# Altium PCB mada7.PcbDoc (part 2 of 3)
Units mil, origin at the board's own origin, x right, y up, seen from the top; angles counter-clockwise.
Board outline 3925 x 3925 mil, 2 copper layers (TopLayer, BottomLayer); 71 components, 72 nets, 888 pads, 9 vias.
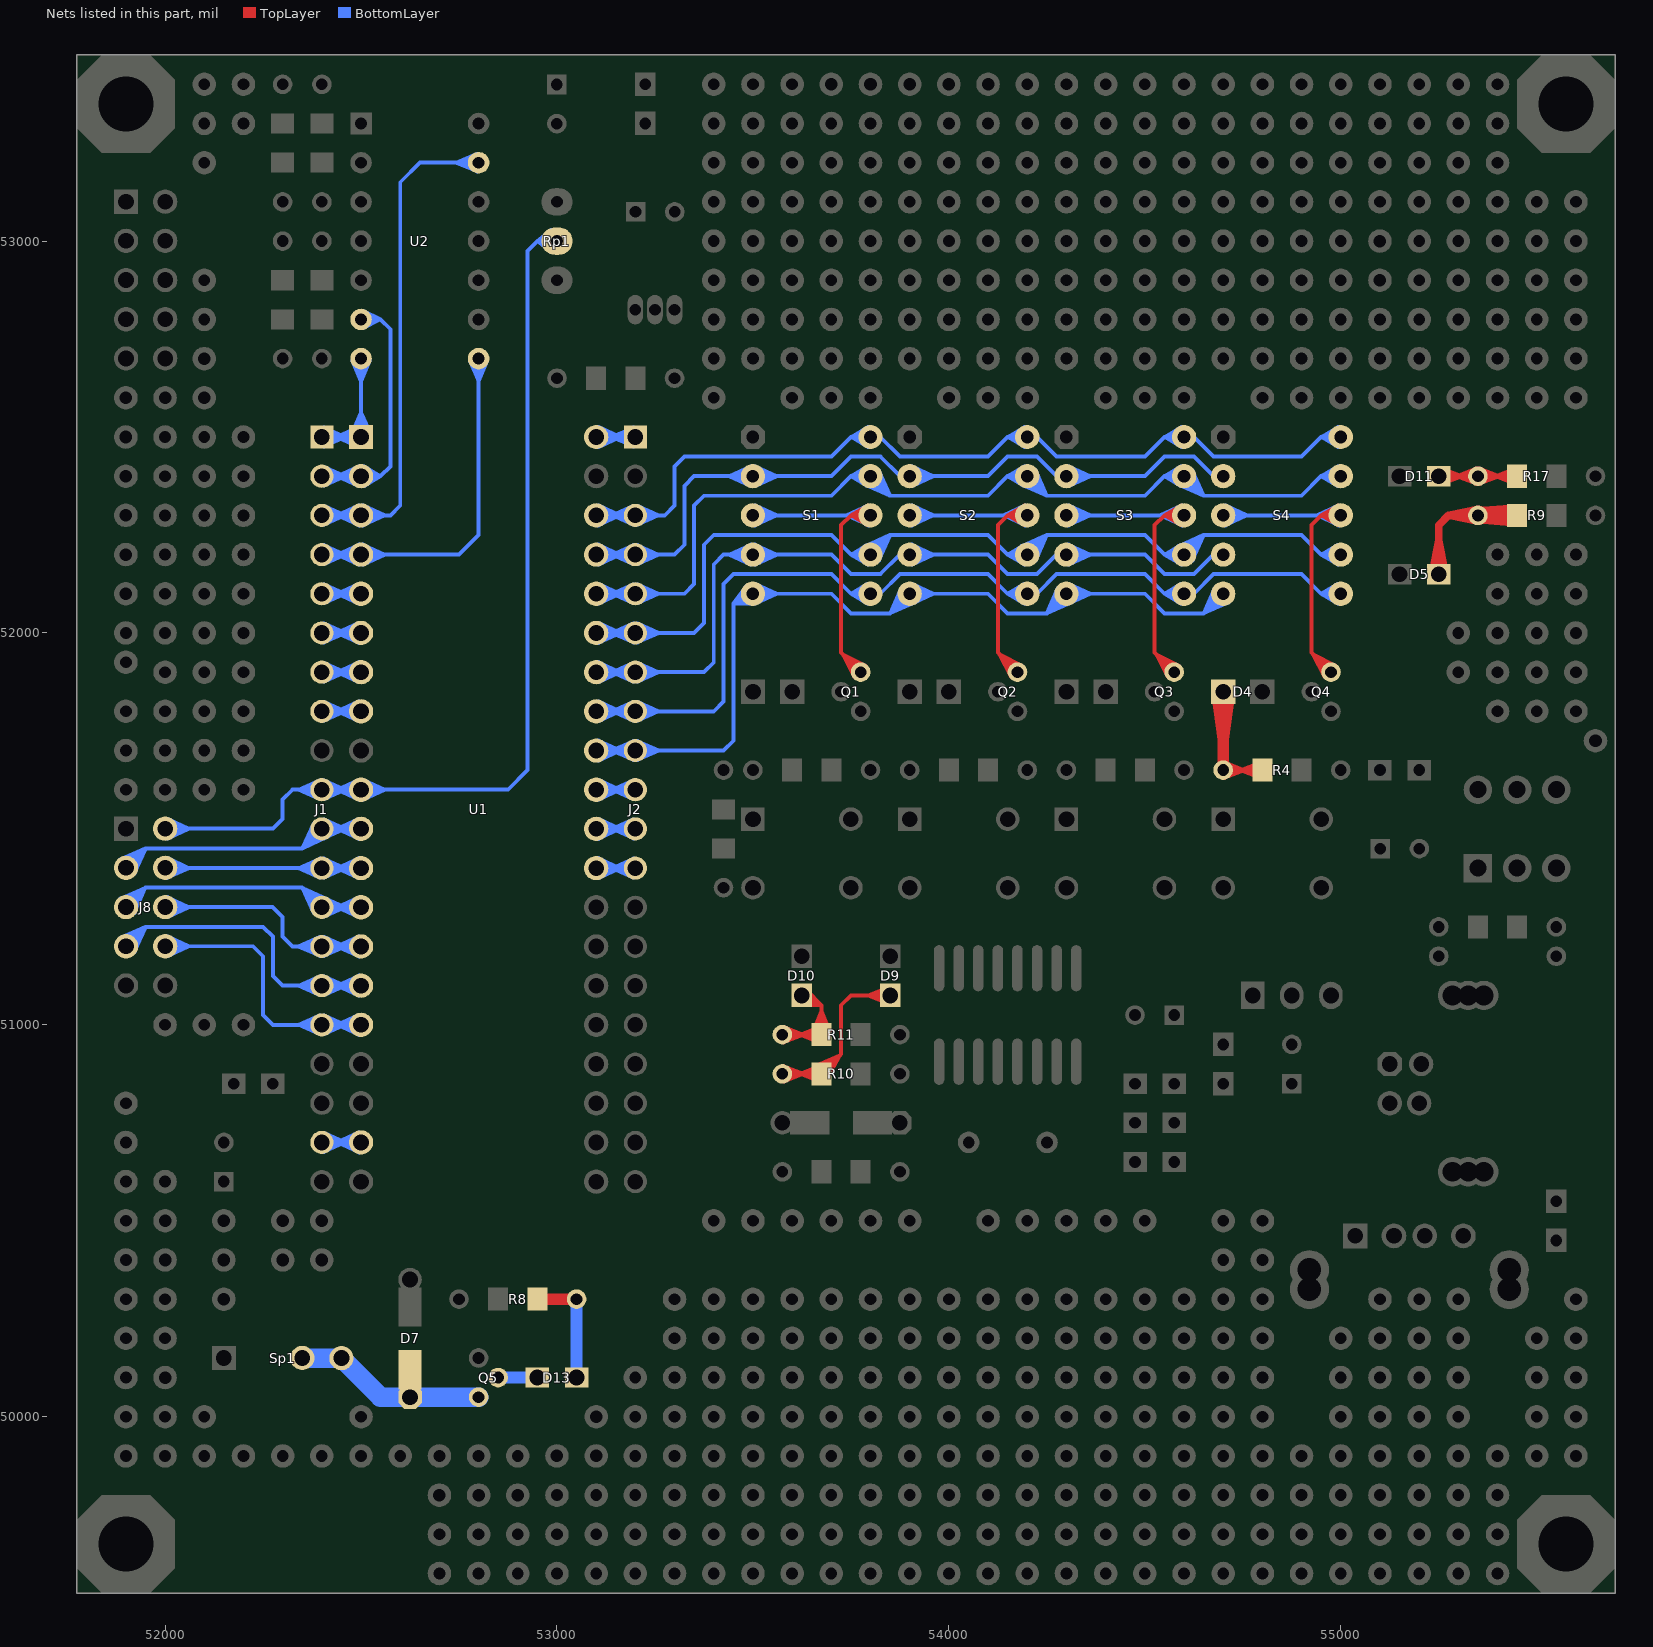
[diagram p2: the nets of this part, all layers, seen from the top]

## Via types
v1: diameter 30, hole 14, TopLayer to BottomLayer, 5 vias
v2: diameter 50, hole 28, TopLayer to BottomLayer, 4 vias

## Nets (pads, with @x,y where several pads share a name; then routed paths per layer and width w, separated by ;. In a path a pad name is that pad's centre, name@x,y a point inside that pad or via, vN(x,y) a via of type N, cw(c..) or ccw(c..) an arc to the next point about the centre after c; other vN are vias at no path point) (continued)
NetD4_2: D4.2 R4.2 R4.4 | length 984.4
  TopLayer w10: R4.2@54700,51650 R4.4@54800,51650 ; R4.2@54700.91,51640.04 54755,51650 ; R4.2@54700.91,51659.96 54755,51650 ; R4.2@54703.64,51630.33 54755,51650 ; R4.2@54703.64,51669.67 54755,51650 ; R4.4@54796.19,51629.77 54744.41,51650 ; R4.4@54796.19,51670.23 54744.41,51650 ; R4.4@54798.99,51639.46 54744.41,51650 ; R4.4@54798.99,51660.54 54744.41,51650
  TopLayer w30: D4.2@54684.04,51848.94 54700,51729 D4.2@54715.96,51848.94 ; R4.2@54700,51650 D4.2@54700,51850
NetD5_2: D5.2 R9.2 R9.4 | length 1512.1
  TopLayer w20: D5.2@55234.07,52151.49 55250,52236 D5.2@55265.93,52151.49 ; D5.2@55250,52150 55250,52275 55275,52300 ; R9.2@55348.5,52285.08 55275,52300 ; R9.2@55348.5,52314.92 55275,52300 ; R9.2@55351.32,52285.06 55435,52300 R9.2@55351.32,52314.94 ; R9.4@55447.03,52288.63 R9.2@55364.83,52312.53 ; R9.4@55447.03,52311.37 R9.2@55364.83,52287.47 ; R9.4@55448.58,52284.47 55364.41,52300 R9.4@55448.58,52315.53 ; R9.4@55450,52296.06 R9.2@55364.83,52287.47 ; R9.4@55450,52300 R9.2@55350,52300 55275,52300 ; R9.4@55450,52303.94 R9.2@55364.83,52312.53 ; R9.4@55450.15,52280.47 R9.2@55364.83,52287.47 ; R9.4@55450.15,52319.53 R9.2@55364.83,52312.53
NetD7_1: D7.1 D7.3 Q5.3 Sp1.2 Sp1.3 | length 866.6
  BottomLayer w10: Q5.3@52775,50050 Q5.3@52800,50050
  BottomLayer w50: Sp1.2@52350,50149.67 Sp1.3@52450.09,50149.67 ; Sp1.2@52350,50150 Sp1.3@52450.09,50149.67 ; Sp1.3@52450.09,50149.67 52549.76,50050 ; 52549.76,50050 D7.1@52625,50050 ; 52549.76,50050 D7.1@52625,50050 ; D7.1@52625,50050 Q5.3@52800,50050 D7.1@52625,50050
NetD9_2: D9.2 R10.2 R10.4 | length 1414.8
  TopLayer w10: R10.2@53575,50875 R10.4@53675,50875 53725,50925 53725,51050 53750,51075 D9.2@53850,51075 ; R10.2@53575.91,50865.04 53630,50875 ; R10.2@53575.91,50884.96 53630,50875 ; R10.2@53578.64,50855.33 53630,50875 ; R10.2@53578.64,50894.67 53630,50875 ; R10.4@53663.74,50896.18 53721.8,50921.8 ; R10.4@53668.52,50887.32 53721.8,50921.8 ; R10.4@53671.19,50854.77 53619.41,50875 ; R10.4@53671.19,50895.23 53619.41,50875 ; R10.4@53673.99,50864.46 53619.41,50875 ; R10.4@53673.99,50885.54 53619.41,50875 ; R10.4@53675,50878.94 53721.8,50921.8 ; R10.4@53682.78,50871.75 53721.8,50921.8 ; R10.4@53691.19,50866.21 53721.8,50921.8 ; D9.2@53846.06,51054.37 53794,51075 ; D9.2@53846.06,51095.63 53794,51075 ; D9.2@53848.92,51064.05 53794,51075 ; D9.2@53848.92,51085.95 53794,51075
NetD10_2: D10.2 R11.2 R11.4 | length 1201.8
  TopLayer w10: R11.2@53575,50975 R11.4@53675,50975 53675,51050 ; R11.2@53575.91,50965.04 53630,50975 ; R11.2@53575.91,50984.96 53630,50975 ; R11.2@53578.64,50955.33 53630,50975 ; R11.2@53578.64,50994.67 53630,50975 ; D10.2@53620.77,51050.43 53675,51050 ; D10.2@53621.79,51060.48 53675,51050 ; D10.2@53625,51071 53675,51050 ; D10.2@53630.27,51080.66 53675,51050 ; D10.2@53636.73,51088.42 53675,51050 ; D10.2@53650,51075 53675,51050 ; R11.4@53654.77,50982.75 53675,51034.53 ; R11.4@53664.46,50979.95 53675,51034.53 ; R11.4@53671.19,50954.77 53619.41,50975 ; R11.4@53671.19,50995.23 53619.41,50975 ; R11.4@53673.99,50964.46 53619.41,50975 ; R11.4@53673.99,50985.54 53619.41,50975 ; R11.4@53675,50978.94 53675,51034.53 ; R11.4@53685.54,50979.95 53675,51034.53 ; R11.4@53695.23,50982.75 53675,51034.53
NetD11_2: D11.2 R17.2 R17.4 | length 1142.4
  TopLayer w10: D11.2@55250,52400 R17.2@55350,52400 R17.4@55450,52400 ; D11.2@55254,52400 55310,52400 ; D11.2@55255.08,52389.05 55310,52400 ; D11.2@55255.08,52410.95 55310,52400 ; D11.2@55257.94,52379.37 55310,52400 ; D11.2@55257.94,52420.63 55310,52400 ; R17.2@55346.36,52380.33 55295,52400 ; R17.2@55346.36,52419.67 55295,52400 ; R17.2@55349.09,52390.04 55295,52400 ; R17.2@55349.09,52409.96 55295,52400 ; R17.2@55350.91,52390.04 55405,52400 ; R17.2@55350.91,52409.96 55405,52400 ; R17.2@55353.64,52380.33 55405,52400 ; R17.2@55353.64,52419.67 55405,52400 ; R17.4@55446.19,52379.77 55394.41,52400 ; R17.4@55446.19,52420.23 55394.41,52400 ; R17.4@55448.99,52389.46 55394.41,52400 ; R17.4@55448.99,52410.54 55394.41,52400
NetD13_1: D13.1 Q5.2 | length 196
  BottomLayer w30: D13.1@52946,50100 Q5.2@52850,50100 D13.1@52950,50100
NetD13_2: D13.2 R8.1 R8.3 | length 400
  TopLayer w30: R8.3@52950,50300 R8.1@53050,50300 R8.3@52950,50300
  BottomLayer w30: D13.2@53050,50100 R8.1@53050,50300
NetJ1_5: J1.5 U1.5 | length 704.1
  BottomLayer w10: J1.5@52400,52100 U1.5@52500,52100 ; J1.5@52401.77,52085.58 52459.53,52100 ; J1.5@52401.77,52114.42 52459.53,52100 ; J1.5@52405.05,52076 52459.53,52100 ; J1.5@52405.05,52124 52459.53,52100 ; U1.5@52494.46,52074.6 52439,52100 ; U1.5@52494.46,52125.4 52439,52100 ; U1.5@52497.9,52084.14 52439,52100 ; U1.5@52497.9,52115.86 52439,52100 ; U1.5@52499.7,52094.01 52439,52100 ; U1.5@52499.7,52105.99 52439,52100
NetJ1_6: J1.6 U1.6 | length 704.1
  BottomLayer w10: J1.6@52400,52000 U1.6@52500,52000 ; J1.6@52401.77,51985.58 52459.53,52000 ; J1.6@52401.77,52014.42 52459.53,52000 ; J1.6@52405.05,51976 52459.53,52000 ; J1.6@52405.05,52024 52459.53,52000 ; U1.6@52494.46,51974.6 52439,52000 ; U1.6@52494.46,52025.4 52439,52000 ; U1.6@52497.9,51984.14 52439,52000 ; U1.6@52497.9,52015.86 52439,52000 ; U1.6@52499.7,51994.01 52439,52000 ; U1.6@52499.7,52005.99 52439,52000
NetJ1_7: J1.7 U1.7 | length 704.1
  BottomLayer w10: J1.7@52400,51900 U1.7@52500,51900 ; J1.7@52401.77,51885.58 52459.53,51900 ; J1.7@52401.77,51914.42 52459.53,51900 ; J1.7@52405.05,51876 52459.53,51900 ; J1.7@52405.05,51924 52459.53,51900 ; U1.7@52494.46,51874.6 52439,51900 ; U1.7@52494.46,51925.4 52439,51900 ; U1.7@52497.9,51884.14 52439,51900 ; U1.7@52497.9,51915.86 52439,51900 ; U1.7@52499.7,51894.01 52439,51900 ; U1.7@52499.7,51905.99 52439,51900
NetJ1_8: J1.8 U1.8 | length 704.1
  BottomLayer w10: J1.8@52400,51800 U1.8@52500,51800 ; J1.8@52401.77,51785.58 52459.53,51800 ; J1.8@52401.77,51814.42 52459.53,51800 ; J1.8@52405.05,51776 52459.53,51800 ; J1.8@52405.05,51824 52459.53,51800 ; U1.8@52494.46,51774.6 52439,51800 ; U1.8@52494.46,51825.4 52439,51800 ; U1.8@52497.9,51784.14 52439,51800 ; U1.8@52497.9,51815.86 52439,51800 ; U1.8@52499.7,51794.01 52439,51800 ; U1.8@52499.7,51805.99 52439,51800
NetJ1_19: J1.19 U1.19 | length 704.1
  BottomLayer w10: J1.19@52400,50700 U1.19@52500,50700 ; J1.19@52401.77,50685.58 52459.53,50700 ; J1.19@52401.77,50714.42 52459.53,50700 ; J1.19@52405.05,50676 52459.53,50700 ; J1.19@52405.05,50724 52459.53,50700 ; U1.19@52494.46,50674.6 52439,50700 ; U1.19@52494.46,50725.4 52439,50700 ; U1.19@52497.9,50684.14 52439,50700 ; U1.19@52497.9,50715.86 52439,50700 ; U1.19@52499.7,50694.01 52439,50700 ; U1.19@52499.7,50705.99 52439,50700
NetJ2_1: J2.1 U1.40 | length 704.1
  BottomLayer w10: U1.40@53100,52500 J2.1@53200,52500 ; U1.40@53100.3,52494.01 53161,52500 ; U1.40@53100.3,52505.99 53161,52500 ; U1.40@53102.1,52484.14 53161,52500 ; U1.40@53102.1,52515.86 53161,52500 ; U1.40@53105.54,52474.6 53161,52500 ; U1.40@53105.54,52525.4 53161,52500 ; J2.1@53194.95,52476 53140.47,52500 ; J2.1@53194.95,52524 53140.47,52500 ; J2.1@53198.23,52485.58 53140.47,52500 ; J2.1@53198.23,52514.42 53140.47,52500
NetJ2_10: J2.10 U1.31 | length 704.1
  BottomLayer w10: U1.31@53100,51600 J2.10@53200,51600 ; U1.31@53100.3,51594.01 53161,51600 ; U1.31@53100.3,51605.99 53161,51600 ; U1.31@53102.1,51584.14 53161,51600 ; U1.31@53102.1,51615.86 53161,51600 ; U1.31@53105.54,51574.6 53161,51600 ; U1.31@53105.54,51625.4 53161,51600 ; J2.10@53194.95,51576 53140.47,51600 ; J2.10@53194.95,51624 53140.47,51600 ; J2.10@53198.23,51585.58 53140.47,51600 ; J2.10@53198.23,51614.42 53140.47,51600
NetJ2_11: J2.11 U1.30 | length 704.1
  BottomLayer w10: U1.30@53100,51500 J2.11@53200,51500 ; U1.30@53100.3,51494.01 53161,51500 ; U1.30@53100.3,51505.99 53161,51500 ; U1.30@53102.1,51484.14 53161,51500 ; U1.30@53102.1,51515.86 53161,51500 ; U1.30@53105.54,51474.6 53161,51500 ; U1.30@53105.54,51525.4 53161,51500 ; J2.11@53194.95,51476 53140.47,51500 ; J2.11@53194.95,51524 53140.47,51500 ; J2.11@53198.23,51485.58 53140.47,51500 ; J2.11@53198.23,51514.42 53140.47,51500
NetJ2_12: J2.12 U1.29 | length 704.1
  BottomLayer w10: U1.29@53100,51400 J2.12@53200,51400 ; U1.29@53100.3,51394.01 53161,51400 ; U1.29@53100.3,51405.99 53161,51400 ; U1.29@53102.1,51384.14 53161,51400 ; U1.29@53102.1,51415.86 53161,51400 ; U1.29@53105.54,51374.6 53161,51400 ; U1.29@53105.54,51425.4 53161,51400 ; J2.12@53194.95,51376 53140.47,51400 ; J2.12@53194.95,51424 53140.47,51400 ; J2.12@53198.23,51385.58 53140.47,51400 ; J2.12@53198.23,51414.42 53140.47,51400
NetQ1_3: Q1.3 S1.3 S1.8 | length 2074.5
  TopLayer w10: Q1.3@53758.86,51888.19 53728.79,51946.21 ; Q1.3@53767.41,51893.49 53728.79,51946.21 ; Q1.3@53775,51900 53725,51950 53725,52275 53750,52300 ; Q1.3@53781.51,51907.59 53728.79,51946.21 ; Q1.3@53786.81,51916.14 53728.79,51946.21 ; S1.8@53793.24,52274.89 53750,52300 ; S1.8@53793.24,52325.11 53750,52300 ; S1.8@53797.44,52284.21 53750,52300 ; S1.8@53797.44,52315.79 53750,52300 ; S1.8@53799.64,52294.01 53750,52300 ; S1.8@53799.64,52305.99 53750,52300 ; S1.8@53800,52300 53750,52300
  BottomLayer w10: S1.3@53500,52300 S1.8@53800,52300 ; S1.3@53500.3,52294.01 53561,52300 ; S1.3@53500.3,52305.99 53561,52300 ; S1.3@53502.1,52284.14 53561,52300 ; S1.3@53502.1,52315.86 53561,52300 ; S1.3@53505.54,52274.6 53561,52300 ; S1.3@53505.54,52325.4 53561,52300 ; S1.8@53794.46,52274.6 53739,52300 ; S1.8@53794.46,52325.4 53739,52300 ; S1.8@53797.9,52284.14 53739,52300 ; S1.8@53797.9,52315.86 53739,52300 ; S1.8@53799.7,52294.01 53739,52300 ; S1.8@53799.7,52305.99 53739,52300
NetQ2_3: Q2.3 S2.3 S2.8 | length 2074.5
  TopLayer w10: Q2.3@54158.86,51888.19 54128.79,51946.21 ; Q2.3@54167.41,51893.49 54128.79,51946.21 ; Q2.3@54175,51900 54125,51950 54125,52275 54150,52300 ; Q2.3@54181.51,51907.59 54128.79,51946.21 ; Q2.3@54186.81,51916.14 54128.79,51946.21 ; S2.8@54193.24,52274.89 54150,52300 ; S2.8@54193.24,52325.11 54150,52300 ; S2.8@54197.44,52284.21 54150,52300 ; S2.8@54197.44,52315.79 54150,52300 ; S2.8@54199.64,52294.01 54150,52300 ; S2.8@54199.64,52305.99 54150,52300 ; S2.8@54200,52300 54150,52300
  BottomLayer w10: S2.3@53900,52300 S2.8@54200,52300 ; S2.3@53900.3,52294.01 53961,52300 ; S2.3@53900.3,52305.99 53961,52300 ; S2.3@53902.1,52284.14 53961,52300 ; S2.3@53902.1,52315.86 53961,52300 ; S2.3@53905.54,52274.6 53961,52300 ; S2.3@53905.54,52325.4 53961,52300 ; S2.8@54194.46,52274.6 54139,52300 ; S2.8@54194.46,52325.4 54139,52300 ; S2.8@54197.9,52284.14 54139,52300 ; S2.8@54197.9,52315.86 54139,52300 ; S2.8@54199.7,52294.01 54139,52300 ; S2.8@54199.7,52305.99 54139,52300
NetQ3_3: Q3.3 S3.3 S3.8 | length 2074.5
  TopLayer w10: Q3.3@54558.86,51888.19 54528.79,51946.21 ; Q3.3@54567.41,51893.49 54528.79,51946.21 ; Q3.3@54575,51900 54525,51950 54525,52275 54550,52300 ; Q3.3@54581.51,51907.59 54528.79,51946.21 ; Q3.3@54586.81,51916.14 54528.79,51946.21 ; S3.8@54593.24,52274.89 54550,52300 ; S3.8@54593.24,52325.11 54550,52300 ; S3.8@54597.44,52284.21 54550,52300 ; S3.8@54597.44,52315.79 54550,52300 ; S3.8@54599.64,52294.01 54550,52300 ; S3.8@54599.64,52305.99 54550,52300 ; S3.8@54600,52300 54550,52300
  BottomLayer w10: S3.3@54300,52300 S3.8@54600,52300 ; S3.3@54300.3,52294.01 54361,52300 ; S3.3@54300.3,52305.99 54361,52300 ; S3.3@54302.1,52284.14 54361,52300 ; S3.3@54302.1,52315.86 54361,52300 ; S3.3@54305.54,52274.6 54361,52300 ; S3.3@54305.54,52325.4 54361,52300 ; S3.8@54594.46,52274.6 54539,52300 ; S3.8@54594.46,52325.4 54539,52300 ; S3.8@54597.9,52284.14 54539,52300 ; S3.8@54597.9,52315.86 54539,52300 ; S3.8@54599.7,52294.01 54539,52300 ; S3.8@54599.7,52305.99 54539,52300
NetQ4_3: Q4.3 S4.3 S4.8 | length 2074.5
  TopLayer w10: Q4.3@54958.86,51888.19 54928.79,51946.21 ; Q4.3@54967.41,51893.49 54928.79,51946.21 ; Q4.3@54975,51900 54925,51950 54925,52275 54950,52300 ; Q4.3@54981.51,51907.59 54928.79,51946.21 ; Q4.3@54986.81,51916.14 54928.79,51946.21 ; S4.8@54993.24,52274.89 54950,52300 ; S4.8@54993.24,52325.11 54950,52300 ; S4.8@54997.44,52284.21 54950,52300 ; S4.8@54997.44,52315.79 54950,52300 ; S4.8@54999.64,52294.01 54950,52300 ; S4.8@54999.64,52305.99 54950,52300 ; S4.8@55000,52300 54950,52300
  BottomLayer w10: S4.3@54700,52300 S4.8@55000,52300 ; S4.3@54700.3,52294.01 54761,52300 ; S4.3@54700.3,52305.99 54761,52300 ; S4.3@54702.1,52284.14 54761,52300 ; S4.3@54702.1,52315.86 54761,52300 ; S4.3@54705.54,52274.6 54761,52300 ; S4.3@54705.54,52325.4 54761,52300 ; S4.8@54994.46,52274.6 54939,52300 ; S4.8@54994.46,52325.4 54939,52300 ; S4.8@54997.9,52284.14 54939,52300 ; S4.8@54997.9,52315.86 54939,52300 ; S4.8@54999.7,52294.01 54939,52300 ; S4.8@54999.7,52305.99 54939,52300
P00: J1.1 U1.1 U2.7 | length 1500.1
  BottomLayer w10: J1.1@52400,52500 U1.1@52500,52500 U2.7@52500,52700 ; J1.1@52401.77,52485.58 52459.53,52500 ; J1.1@52401.77,52514.42 52459.53,52500 ; J1.1@52405.05,52476 52459.53,52500 ; J1.1@52405.05,52524 52459.53,52500 ; U1.1@52474.6,52505.54 52500,52561 ; U2.7@52477.93,52695.6 52500,52642.5 ; U1.1@52484.14,52502.1 52500,52561 ; U2.7@52487.57,52698.64 52500,52642.5 ; U1.1@52494.01,52500.3 52500,52561 ; U1.1@52494.46,52474.6 52439,52500 ; U1.1@52494.46,52525.4 52439,52500 ; U1.1@52497.9,52484.14 52439,52500 ; U1.1@52497.9,52515.86 52439,52500 ; U1.1@52499.7,52494.01 52439,52500 ; U1.1@52499.7,52505.99 52439,52500 ; U1.1@52505.99,52500.3 52500,52561 ; U2.7@52512.43,52698.64 52500,52642.5 ; U1.1@52515.86,52502.1 52500,52561 ; U2.7@52522.07,52695.6 52500,52642.5 ; U1.1@52525.4,52505.54 52500,52561
P01: J1.2 U1.2 U2.6 | length 1724.8
  BottomLayer w10: J1.2@52400,52400 U1.2@52500,52400 52550,52400 ; J1.2@52401.77,52385.58 52459.53,52400 ; J1.2@52401.77,52414.42 52459.53,52400 ; J1.2@52405.05,52376 52459.53,52400 ; J1.2@52405.05,52424 52459.53,52400 ; U1.2@52494.46,52374.6 52439,52400 ; U1.2@52494.46,52425.4 52439,52400 ; U1.2@52497.9,52384.14 52439,52400 ; U1.2@52497.9,52415.86 52439,52400 ; U1.2@52499.7,52394.01 52439,52400 ; U1.2@52499.7,52405.99 52439,52400 ; U2.6@52500,52800 52550,52800 ; U1.2@52500.36,52394.01 52550,52400 ; U1.2@52500.36,52405.99 52550,52400 ; U2.6@52501.56,52787.6 52550,52800 ; U2.6@52501.56,52812.4 52550,52800 ; U1.2@52502.56,52384.21 52550,52400 ; U1.2@52502.56,52415.79 52550,52400 ; U2.6@52505.06,52778.08 52550,52800 ; U2.6@52505.06,52821.92 52550,52800 ; U1.2@52506.76,52374.89 52550,52400 ; U1.2@52506.76,52425.11 52550,52400 ; 52550,52400 52575,52425 52575,52775 52550,52800
P02: J1.3 U1.3 U2.13 | length 2456.2
  BottomLayer w10: J1.3@52400,52300 U1.3@52500,52300 52575,52300 52600,52325 52600,53150 52650,53200 U2.13@52800,53200 ; J1.3@52401.77,52285.58 52459.53,52300 ; J1.3@52401.77,52314.42 52459.53,52300 ; J1.3@52405.05,52276 52459.53,52300 ; J1.3@52405.05,52324 52459.53,52300 ; U1.3@52494.46,52274.6 52439,52300 ; U1.3@52494.46,52325.4 52439,52300 ; U1.3@52497.9,52284.14 52439,52300 ; U1.3@52497.9,52315.86 52439,52300 ; U1.3@52499.7,52294.01 52439,52300 ; U1.3@52499.7,52305.99 52439,52300 ; U1.3@52500.3,52294.01 52561,52300 ; U1.3@52500.3,52305.99 52561,52300 ; U1.3@52502.1,52284.14 52561,52300 ; U1.3@52502.1,52315.86 52561,52300 ; U1.3@52505.54,52274.6 52561,52300 ; U1.3@52505.54,52325.4 52561,52300 ; U2.13@52795.6,53177.93 52742.5,53200 ; U2.13@52795.6,53222.07 52742.5,53200 ; U2.13@52798.64,53187.57 52742.5,53200 ; U2.13@52798.64,53212.43 52742.5,53200
P03: J1.4 U1.4 U2.8 | length 2070.8
  BottomLayer w10: J1.4@52400,52200 U1.4@52500,52200 52750,52200 52800,52250 U2.8@52800,52700 ; J1.4@52401.77,52185.58 52459.53,52200 ; J1.4@52401.77,52214.42 52459.53,52200 ; J1.4@52405.05,52176 52459.53,52200 ; J1.4@52405.05,52224 52459.53,52200 ; U1.4@52494.46,52174.6 52439,52200 ; U1.4@52494.46,52225.4 52439,52200 ; U1.4@52497.9,52184.14 52439,52200 ; U1.4@52497.9,52215.86 52439,52200 ; U1.4@52499.7,52194.01 52439,52200 ; U1.4@52499.7,52205.99 52439,52200 ; U1.4@52500.3,52194.01 52561,52200 ; U1.4@52500.3,52205.99 52561,52200 ; U1.4@52502.1,52184.14 52561,52200 ; U1.4@52502.1,52215.86 52561,52200 ; U1.4@52505.54,52174.6 52561,52200 ; U1.4@52505.54,52225.4 52561,52200 ; U2.8@52777.93,52695.6 52800,52642.5 ; U2.8@52787.57,52698.64 52800,52642.5 ; U2.8@52812.43,52698.64 52800,52642.5 ; U2.8@52822.07,52695.6 52800,52642.5
P11: J1.10 J8.2 Rp1.2 U1.10 | length 4315.5
  BottomLayer w10: J8.2@52000.29,51500.5 52275.5,51500.5 52300,51525 52300,51575 52325,51600 J1.10@52400,51600 U1.10@52500,51600 52875,51600 52925,51650 52925,52550 52925,52975 52950,53000 ; J8.2@52000.58,51494.51 52061.29,51500.5 ; J8.2@52000.58,51506.49 52061.29,51500.5 ; J8.2@52002.39,51484.64 52061.29,51500.5 ; J8.2@52002.39,51516.36 52061.29,51500.5 ; J8.2@52005.83,51475.1 52061.29,51500.5 ; J8.2@52005.83,51525.9 52061.29,51500.5 ; J1.10@52394.95,51576 52340.47,51600 ; J1.10@52394.95,51624 52340.47,51600 ; J1.10@52398.23,51585.58 52340.47,51600 ; J1.10@52398.23,51614.42 52340.47,51600 ; J1.10@52401.77,51585.58 52459.53,51600 ; J1.10@52401.77,51614.42 52459.53,51600 ; J1.10@52405.05,51576 52459.53,51600 ; J1.10@52405.05,51624 52459.53,51600 ; U1.10@52494.46,51574.6 52439,51600 ; U1.10@52494.46,51625.4 52439,51600 ; U1.10@52497.9,51584.14 52439,51600 ; U1.10@52497.9,51615.86 52439,51600 ; U1.10@52499.7,51594.01 52439,51600 ; U1.10@52499.7,51605.99 52439,51600 ; U1.10@52500.3,51594.01 52561,51600 ; U1.10@52500.3,51605.99 52561,51600 ; U1.10@52502.1,51584.14 52561,51600 ; U1.10@52502.1,51615.86 52561,51600 ; U1.10@52505.54,51574.6 52561,51600 ; U1.10@52505.54,51625.4 52561,51600 ; Rp1.2@52985,52971.72 52950,53000 ; Rp1.2@52985,53028.28 52950,53000 ; Rp1.2@52990.56,52980.5 52950,53000 ; Rp1.2@52990.56,53019.5 52950,53000 ; Rp1.2@52993.89,52990.06 52950,53000 ; Rp1.2@52993.89,53009.94 52950,53000 ; Rp1.2@52995,53000 52950,53000 ; Rp1.2@53000,53000 52950,53000
P12: J1.11 J8.3 U1.11 | length 2019
  BottomLayer w10: J8.3@51885.67,51422 51950,51450 ; J8.3@51890.36,51413.05 51950,51450 ; J8.3@51896.24,51404.93 51950,51450 ; J8.3@51904.7,51396.43 51950,51450 ; J8.3@51912.8,51390.52 51950,51450 ; J8.3@51921.73,51385.79 51950,51450 ; J1.11@52379.91,51514.07 52350,51450 ; J1.11@52388.73,51509.16 52350,51450 ; J1.11@52401.77,51485.58 52459.53,51500 ; J1.11@52401.77,51514.42 52459.53,51500 ; J1.11@52405.05,51476 52459.53,51500 ; J1.11@52405.05,51524 52459.53,51500 ; J1.11@52409.16,51488.73 52350,51450 ; J1.11@52414.07,51479.91 52350,51450 ; U1.11@52494.46,51474.6 52439,51500 ; U1.11@52494.46,51525.4 52439,51500 ; U1.11@52497.9,51484.14 52439,51500 ; U1.11@52497.9,51515.86 52439,51500 ; U1.11@52499.7,51494.01 52439,51500 ; U1.11@52499.7,51505.99 52439,51500 ; U1.11@52500,51500 J1.11@52400,51500 52350,51450 ; 51950,51450 J8.3@51900.29,51400.5 51900.5,51400.5 51950,51450 ; 51950,51450 52350,51450
P13: J1.12 J8.4 U1.12 | length 1769.3
  BottomLayer w10: J8.4@52000,51400 J1.12@52400,51400 U1.12@52500,51400 ; J8.4@52000.29,51400.5 52061.29,51400 ; J8.4@52000.53,51394.5 52061.29,51400 ; J8.4@52000.63,51406.49 52061.29,51400 ; J8.4@52002.26,51384.62 52061.29,51400 ; J8.4@52002.52,51416.34 52061.29,51400 ; J8.4@52005.62,51375.05 52061.29,51400 ; J8.4@52006.04,51425.86 52061.29,51400 ; J1.12@52394.95,51376 52340.47,51400 ; J1.12@52394.95,51424 52340.47,51400 ; J1.12@52398.23,51385.58 52340.47,51400 ; J1.12@52398.23,51414.42 52340.47,51400 ; J1.12@52401.77,51385.58 52459.53,51400 ; J1.12@52401.77,51414.42 52459.53,51400 ; J1.12@52405.05,51376 52459.53,51400 ; J1.12@52405.05,51424 52459.53,51400 ; U1.12@52494.46,51374.6 52439,51400 ; U1.12@52494.46,51425.4 52439,51400 ; U1.12@52497.9,51384.14 52439,51400 ; U1.12@52497.9,51415.86 52439,51400 ; U1.12@52499.7,51394.01 52439,51400 ; U1.12@52499.7,51405.99 52439,51400
P14: J1.13 J8.5 U1.13 | length 1947.9
  BottomLayer w10: J8.5@51885.64,51321.98 51949.79,51350 ; J8.5@51890.34,51313.03 51949.79,51350 ; J8.5@51896.23,51304.92 51949.79,51350 ; J8.5@51900.29,51300.5 51949.79,51350 ; J8.5@51904.71,51296.44 51949.79,51350 ; J8.5@51912.82,51290.55 51949.79,51350 ; J8.5@51921.77,51285.85 51949.79,51350 ; J1.13@52379.91,51285.93 52350,51350 ; J1.13@52388.73,51290.84 52350,51350 ; J1.13@52401.77,51285.58 52459.53,51300 ; J1.13@52401.77,51314.42 52459.53,51300 ; J1.13@52405.05,51276 52459.53,51300 ; J1.13@52405.05,51324 52459.53,51300 ; J1.13@52409.16,51311.27 52350,51350 ; J1.13@52414.07,51320.09 52350,51350 ; U1.13@52494.46,51274.6 52439,51300 ; U1.13@52494.46,51325.4 52439,51300 ; U1.13@52497.9,51284.14 52439,51300 ; U1.13@52497.9,51315.86 52439,51300 ; U1.13@52499.7,51294.01 52439,51300 ; U1.13@52499.7,51305.99 52439,51300 ; U1.13@52500,51300 J1.13@52400,51300 52350,51350 ; 51949.79,51350 52350,51350
P15: J1.14 J8.6 U1.14 | length 1778.9
  BottomLayer w10: J8.6@52000.29,51300.5 52274.5,51300.5 52300,51275 52300,51225 52325,51200 J1.14@52400,51200 U1.14@52500,51200 ; J8.6@52000.58,51294.51 52061.29,51300.5 ; J8.6@52000.58,51306.49 52061.29,51300.5 ; J8.6@52002.39,51284.64 52061.29,51300.5 ; J8.6@52002.39,51316.36 52061.29,51300.5 ; J8.6@52005.83,51275.1 52061.29,51300.5 ; J8.6@52005.83,51325.9 52061.29,51300.5 ; J1.14@52394.95,51176 52340.47,51200 ; J1.14@52394.95,51224 52340.47,51200 ; J1.14@52398.23,51185.58 52340.47,51200 ; J1.14@52398.23,51214.42 52340.47,51200 ; J1.14@52401.77,51185.58 52459.53,51200 ; J1.14@52401.77,51214.42 52459.53,51200 ; J1.14@52405.05,51176 52459.53,51200 ; J1.14@52405.05,51224 52459.53,51200 ; U1.14@52494.46,51174.6 52439,51200 ; U1.14@52494.46,51225.4 52439,51200 ; U1.14@52497.9,51184.14 52439,51200 ; U1.14@52497.9,51215.86 52439,51200 ; U1.14@52499.7,51194.01 52439,51200 ; U1.14@52499.7,51205.99 52439,51200
P16: J1.15 J8.7 U1.15 | length 2074.2
  BottomLayer w10: J8.7@51885.67,51222 51950,51250 ; J8.7@51890.36,51213.05 51950,51250 ; J8.7@51896.24,51204.93 51950,51250 ; J8.7@51904.7,51196.43 51950,51250 ; J8.7@51912.8,51190.52 51950,51250 ; J8.7@51921.73,51185.79 51950,51250 ; J1.15@52394.95,51076 52340.47,51100 ; J1.15@52394.95,51124 52340.47,51100 ; J1.15@52398.23,51085.58 52340.47,51100 ; J1.15@52398.23,51114.42 52340.47,51100 ; J1.15@52401.77,51085.58 52459.53,51100 ; J1.15@52401.77,51114.42 52459.53,51100 ; J1.15@52405.05,51076 52459.53,51100 ; J1.15@52405.05,51124 52459.53,51100 ; U1.15@52494.46,51074.6 52439,51100 ; U1.15@52494.46,51125.4 52439,51100 ; U1.15@52497.9,51084.14 52439,51100 ; U1.15@52497.9,51115.86 52439,51100 ; U1.15@52499.7,51094.01 52439,51100 ; U1.15@52499.7,51105.99 52439,51100 ; U1.15@52500,51100 J1.15@52400,51100 52300,51100 52275,51125 52275,51225 52250,51250 51950,51250 ; 51950,51250 J8.7@51900.29,51200.5 51900.5,51200.5 51950,51250
P17: J1.16 J8.8 U1.16 | length 1878.9
  BottomLayer w10: J8.8@52000.29,51200.5 52224.5,51200.5 52250,51175 52250,51025 52275,51000 J1.16@52400,51000 U1.16@52500,51000 ; J8.8@52000.58,51194.51 52061.29,51200.5 ; J8.8@52000.58,51206.49 52061.29,51200.5 ; J8.8@52002.39,51184.64 52061.29,51200.5 ; J8.8@52002.39,51216.36 52061.29,51200.5 ; J8.8@52005.83,51175.1 52061.29,51200.5 ; J8.8@52005.83,51225.9 52061.29,51200.5 ; J1.16@52394.95,50976 52340.47,51000 ; J1.16@52394.95,51024 52340.47,51000 ; J1.16@52398.23,50985.58 52340.47,51000 ; J1.16@52398.23,51014.42 52340.47,51000 ; J1.16@52401.77,50985.58 52459.53,51000 ; J1.16@52401.77,51014.42 52459.53,51000 ; J1.16@52405.05,50976 52459.53,51000 ; J1.16@52405.05,51024 52459.53,51000 ; U1.16@52494.46,50974.6 52439,51000 ; U1.16@52494.46,51025.4 52439,51000 ; U1.16@52497.9,50984.14 52439,51000 ; U1.16@52497.9,51015.86 52439,51000 ; U1.16@52499.7,50994.01 52439,51000 ; U1.16@52499.7,51005.99 52439,51000
P20: J2.9 S1.5 S2.5 S3.5 S4.5 U1.32 | length 5911.4
  BottomLayer w10: U1.32@53100,51700 J2.9@53200,51700 53425,51700 53450,51725 53450,52075 ; U1.32@53100.3,51694.01 53161,51700 ; U1.32@53100.3,51705.99 53161,51700 ; U1.32@53102.1,51684.14 53161,51700 ; U1.32@53102.1,51715.86 53161,51700 ; U1.32@53105.54,51674.6 53161,51700 ; U1.32@53105.54,51725.4 53161,51700 ; J2.9@53194.95,51676 53140.47,51700 ; J2.9@53194.95,51724 53140.47,51700 ; J2.9@53198.23,51685.58 53140.47,51700 ; J2.9@53198.23,51714.42 53140.47,51700 ; J2.9@53201.77,51685.58 53259.53,51700 ; J2.9@53201.77,51714.42 53259.53,51700 ; J2.9@53205.05,51676 53259.53,51700 ; J2.9@53205.05,51724 53259.53,51700 ; S1.5@53483.28,52119.91 53450,52075 ; S1.5@53490.87,52113.14 53450,52075 ; S1.5@53497.03,52105.21 53450,52075 ; S1.5@53500.3,52094.01 53561,52100 ; S1.5@53500.3,52105.99 53561,52100 ; S1.5@53502.1,52084.14 53561,52100 ; S1.5@53502.1,52115.86 53561,52100 ; S1.5@53502.39,52094.5 53450,52075 ; S1.5@53505.03,52084.81 53450,52075 ; S1.5@53505.54,52074.6 53561,52100 ; S1.5@53505.54,52125.4 53561,52100 ; S1.5@53505.9,52074.68 53450,52075 ; S2.5@53878.55,52114.69 53850,52050 ; S2.5@53887.48,52109.96 53850,52050 ; S2.5@53895.58,52104.06 53850,52050 ; S2.5@53900.3,52094.01 53961,52100 ; S2.5@53900.3,52105.99 53961,52100 ; S2.5@53902.1,52084.14 53961,52100 ; S2.5@53902.1,52115.86 53961,52100 ; S2.5@53904.06,52095.58 53850,52050 ; S2.5@53905.54,52074.6 53961,52100 ; S2.5@53905.54,52125.4 53961,52100 ; S2.5@53909.96,52087.48 53850,52050 ; S2.5@53914.69,52078.55 53850,52050 ; S3.5@54278.55,52114.69 54250,52050 ; S3.5@54287.48,52109.96 54250,52050 ; S3.5@54295.58,52104.06 54250,52050 ; S3.5@54300.3,52094.01 54361,52100 ; S3.5@54300.3,52105.99 54361,52100 ; S3.5@54302.1,52084.14 54361,52100 ; S3.5@54302.1,52115.86 54361,52100 ; S3.5@54304.06,52095.58 54250,52050 ; S3.5@54305.54,52074.6 54361,52100 ; S3.5@54305.54,52125.4 54361,52100 ; S3.5@54309.96,52087.48 54250,52050 ; S3.5@54314.69,52078.55 54250,52050 ; S4.5@54678.55,52114.69 54650,52050 ; S4.5@54687.48,52109.96 54650,52050 ; S4.5@54695.58,52104.06 54650,52050 ; S4.5@54704.06,52095.58 54650,52050 ; S4.5@54709.96,52087.48 54650,52050 ; S4.5@54714.69,52078.55 54650,52050 ; 53450,52075 S1.5@53500,52100 ; 53450,52075 53475,52100 S1.5@53500,52100 ; S1.5@53500,52100 53700,52100 53750,52050 53850,52050 ; 53850,52050 S2.5@53900,52100 ; 53850,52050 S2.5@53900,52100 ; S2.5@53900,52100 54100,52100 54150,52050 54250,52050 ; 54250,52050 S3.5@54300,52100 ; 54250,52050 S3.5@54300,52100 ; S3.5@54300,52100 54500,52100 54550,52050 54650,52050 ; 54650,52050 S4.5@54700,52100 54650,52050
P21: J2.8 S1.6 S2.6 S3.6 S4.6 U1.33 | length 5053.6
  BottomLayer w10: U1.33@53100,51800 J2.8@53200,51800 53400,51800 53425,51825 53425,52125 53450,52150 53700,52150 53750,52100 ; U1.33@53100.3,51794.01 53161,51800 ; U1.33@53100.3,51805.99 53161,51800 ; U1.33@53102.1,51784.14 53161,51800 ; U1.33@53102.1,51815.86 53161,51800 ; U1.33@53105.54,51774.6 53161,51800 ; U1.33@53105.54,51825.4 53161,51800 ; J2.8@53194.95,51776 53140.47,51800 ; J2.8@53194.95,51824 53140.47,51800 ; J2.8@53198.23,51785.58 53140.47,51800 ; J2.8@53198.23,51814.42 53140.47,51800 ; J2.8@53201.77,51785.58 53259.53,51800 ; J2.8@53201.77,51814.42 53259.53,51800 ; J2.8@53205.05,51776 53259.53,51800 ; J2.8@53205.05,51824 53259.53,51800 ; S1.6@53793.24,52074.89 53750,52100 ; S1.6@53793.24,52125.11 53750,52100 ; S1.6@53797.44,52084.21 53750,52100 ; S1.6@53797.44,52115.79 53750,52100 ; S1.6@53799.64,52094.01 53750,52100 ; S1.6@53799.64,52105.99 53750,52100 ; S3.6@54593.24,52074.89 54550,52100 ; S3.6@54593.24,52125.11 54550,52100 ; S3.6@54597.44,52084.21 54550,52100 ; S3.6@54597.44,52115.79 54550,52100 ; S3.6@54599.64,52094.01 54550,52100 ; S3.6@54599.64,52105.99 54550,52100 ; S4.6@54993.24,52074.89 54950,52100 ; S4.6@54993.24,52125.11 54950,52100 ; S4.6@54997.44,52084.21 54950,52100 ; S4.6@54997.44,52115.79 54950,52100 ; S4.6@54999.64,52094.01 54950,52100 ; S4.6@54999.64,52105.99 54950,52100 ; S4.6@55025,52100 S4.6@55000,52100 54950,52100 ; 53750,52100 S1.6@53800,52100 ; 53750,52100 S1.6@53800,52100 ; S1.6@53800,52100 53825,52100 53875,52150 54100,52150 ; 54100,52150 54150,52100 ; 54100,52150 54150,52100 ; 54150,52100 S2.6@54200,52100 ; 54150,52100 54199.64,52105.99 54150,52100 ; 54150,52100 54199.64,52094.01 54150,52100 ; 54150,52100 54197.44,52115.79 54150,52100 ; 54150,52100 54197.44,52084.21 54150,52100 ; 54150,52100 54193.24,52125.11 54150,52100 ; 54150,52100 54193.24,52074.89 54150,52100 ; 54150,52100 S2.6@54200,52100 ; 54150,52100 S2.6@54200,52100 ; 54150,52100 S2.6@54200,52100 ; S2.6@54200,52100 54225,52100 54275,52150 54500,52150 54550,52100 ; 54550,52100 S3.6@54600,52100 ; 54550,52100 S3.6@54600,52100 ; S3.6@54600,52100 54625,52100 54675,52150 54900,52150 54950,52100
P22: J2.7 S1.4 S2.4 S3.4 S4.4 U1.34 | length 4226.2
  BottomLayer w10: U1.34@53100,51900 J2.7@53200,51900 53375,51900 53400,51925 53400,52175 53425,52200 S1.4@53500,52200 53700,52200 53750,52150 53825,52150 S2.4@53875,52200 ; U1.34@53100.3,51894.01 53161,51900 ; U1.34@53100.3,51905.99 53161,51900 ; U1.34@53102.1,51884.14 53161,51900 ; U1.34@53102.1,51915.86 53161,51900 ; U1.34@53105.54,51874.6 53161,51900 ; U1.34@53105.54,51925.4 53161,51900 ; J2.7@53194.95,51876 53140.47,51900 ; J2.7@53194.95,51924 53140.47,51900 ; J2.7@53198.23,51885.58 53140.47,51900 ; J2.7@53198.23,51914.42 53140.47,51900 ; J2.7@53201.77,51885.58 53259.53,51900 ; J2.7@53201.77,51914.42 53259.53,51900 ; J2.7@53205.05,51876 53259.53,51900 ; J2.7@53205.05,51924 53259.53,51900 ; S1.4@53494.46,52174.6 53439,52200 ; S1.4@53494.46,52225.4 53439,52200 ; S1.4@53497.9,52184.14 53439,52200 ; S1.4@53497.9,52215.86 53439,52200 ; S1.4@53499.7,52194.01 53439,52200 ; S1.4@53499.7,52205.99 53439,52200 ; S1.4@53500.3,52194.01 53561,52200 ; S1.4@53500.3,52205.99 53561,52200 ; S1.4@53502.1,52184.14 53561,52200 ; S1.4@53502.1,52215.86 53561,52200 ; S1.4@53505.54,52174.6 53561,52200 ; S1.4@53505.54,52225.4 53561,52200 ; S2.4@53900,52200 54075,52200 54100,52200 54150,52150 54225,52150 S3.4@54275,52200 ; S2.4@53900.3,52194.01 53961,52200 ; S2.4@53900.3,52205.99 53961,52200 ; S2.4@53902.1,52184.14 53961,52200 ; S2.4@53902.1,52215.86 53961,52200 ; S2.4@53905.54,52174.6 53961,52200 ; S2.4@53905.54,52225.4 53961,52200 ; S3.4@54300,52200 54500,52200 54550,52150 54625,52150 S4.4@54675,52200 ; S3.4@54300.3,52194.01 54361,52200 ; S3.4@54300.3,52205.99 54361,52200 ; S3.4@54302.1,52184.14 54361,52200 ; S3.4@54302.1,52215.86 54361,52200 ; S3.4@54305.54,52174.6 54361,52200 ; S3.4@54305.54,52225.4 54361,52200
P23: J2.6 S1.7 S2.7 S3.7 S4.7 U1.35 | length 5730.7
  BottomLayer w10: U1.35@53100,52000 J2.6@53200,52000 53350,52000 53375,52025 53375,52225 53400,52250 53700,52250 53750,52200 ; U1.35@53100.3,51994.01 53161,52000 ; U1.35@53100.3,52005.99 53161,52000 ; U1.35@53102.1,51984.14 53161,52000 ; U1.35@53102.1,52015.86 53161,52000 ; U1.35@53105.54,51974.6 53161,52000 ; U1.35@53105.54,52025.4 53161,52000 ; J2.6@53194.95,51976 53140.47,52000 ; J2.6@53194.95,52024 53140.47,52000 ; J2.6@53198.23,51985.58 53140.47,52000 ; J2.6@53198.23,52014.42 53140.47,52000 ; J2.6@53201.77,51985.58 53259.53,52000 ; J2.6@53201.77,52014.42 53259.53,52000 ; J2.6@53205.05,51976 53259.53,52000 ; J2.6@53205.05,52024 53259.53,52000 ; S1.7@53785.31,52221.45 53850,52250 ; S1.7@53790.04,52212.52 53850,52250 ; S1.7@53793.24,52174.89 53750,52200 ; S1.7@53793.24,52225.11 53750,52200 ; S1.7@53795.94,52204.42 53850,52250 ; S1.7@53797.44,52184.21 53750,52200 ; S1.7@53797.44,52215.79 53750,52200 ; S1.7@53799.64,52194.01 53750,52200 ; S1.7@53799.64,52205.99 53750,52200 ; S1.7@53804.42,52195.94 53850,52250 ; S1.7@53812.52,52190.04 53850,52250 ; S1.7@53821.45,52185.31 53850,52250 ; S2.7@54185.31,52221.45 54250,52250 ; S2.7@54190.04,52212.52 54250,52250 ; S2.7@54193.24,52174.89 54150,52200 ; S2.7@54193.24,52225.11 54150,52200 ; S2.7@54195.94,52204.42 54250,52250 ; S2.7@54197.44,52184.21 54150,52200 ; S2.7@54197.44,52215.79 54150,52200 ; S2.7@54199.64,52194.01 54150,52200 ; S2.7@54199.64,52205.99 54150,52200 ; S2.7@54204.42,52195.94 54250,52250 ; S2.7@54212.52,52190.04 54250,52250 ; S2.7@54221.45,52185.31 54250,52250 ; S3.7@54585.31,52221.45 54650,52250 ; S3.7@54590.04,52212.52 54650,52250 ; S3.7@54593.24,52174.89 54550,52200 ; S3.7@54593.24,52225.11 54550,52200 ; S3.7@54595.94,52204.42 54650,52250 ; S3.7@54597.44,52184.21 54550,52200 ; S3.7@54597.44,52215.79 54550,52200 ; S3.7@54599.64,52194.01 54550,52200 ; S3.7@54599.64,52205.99 54550,52200 ; S3.7@54604.42,52195.94 54650,52250 ; S3.7@54612.52,52190.04 54650,52250 ; S3.7@54621.45,52185.31 54650,52250 ; S4.7@54993.24,52174.89 54950,52200 ; S4.7@54993.24,52225.11 54950,52200 ; S4.7@54997.44,52184.21 54950,52200 ; S4.7@54997.44,52215.79 54950,52200 ; S4.7@54999.64,52194.01 54950,52200 ; S4.7@54999.64,52205.99 54950,52200 ; S4.7@55000,52200 54950,52200 ; 53750,52200 S1.7@53800,52200 ; 53750,52200 S1.7@53800,52200 ; S1.7@53800,52200 53850,52250 ; 53850,52250 54100,52250 54150,52200 ; 54150,52200 S2.7@54200,52200 ; 54150,52200 S2.7@54200,52200 ; S2.7@54200,52200 54250,52250 ; 54250,52250 54500,52250 54550,52200 ; 54550,52200 S3.7@54600,52200 ; 54550,52200 S3.7@54600,52200 ; S3.7@54600,52200 54650,52250 ; 54650,52250 54900,52250 54950,52200
P24: J2.5 S1.9 S2.9 S3.9 S4.9 U1.36 | length 5730.7
  BottomLayer w10: U1.36@53100,52100 J2.5@53200,52100 53325,52100 53350,52125 53350,52325 53375,52350 53700,52350 53750,52400 ; U1.36@53100.3,52094.01 53161,52100 ; U1.36@53100.3,52105.99 53161,52100 ; U1.36@53102.1,52084.14 53161,52100 ; U1.36@53102.1,52115.86 53161,52100 ; U1.36@53105.54,52074.6 53161,52100 ; U1.36@53105.54,52125.4 53161,52100 ; J2.5@53194.95,52076 53140.47,52100 ; J2.5@53194.95,52124 53140.47,52100 ; J2.5@53198.23,52085.58 53140.47,52100 ; J2.5@53198.23,52114.42 53140.47,52100 ; J2.5@53201.77,52085.58 53259.53,52100 ; J2.5@53201.77,52114.42 53259.53,52100 ; J2.5@53205.05,52076 53259.53,52100 ; J2.5@53205.05,52124 53259.53,52100 ; S1.9@53785.31,52378.55 53850,52350 ; S1.9@53790.04,52387.48 53850,52350 ; S1.9@53793.24,52374.89 53750,52400 ; S1.9@53793.24,52425.11 53750,52400 ; S1.9@53795.94,52395.58 53850,52350 ; S1.9@53797.44,52384.21 53750,52400 ; S1.9@53797.44,52415.79 53750,52400 ; S1.9@53799.64,52394.01 53750,52400 ; S1.9@53799.64,52405.99 53750,52400 ; S1.9@53804.42,52404.06 53850,52350 ; S1.9@53812.52,52409.96 53850,52350 ; S1.9@53821.45,52414.69 53850,52350 ; S2.9@54185.31,52378.55 54250,52350 ; S2.9@54190.04,52387.48 54250,52350 ; S2.9@54193.24,52374.89 54150,52400 ; S2.9@54193.24,52425.11 54150,52400 ; S2.9@54195.94,52395.58 54250,52350 ; S2.9@54197.44,52384.21 54150,52400 ; S2.9@54197.44,52415.79 54150,52400 ; S2.9@54199.64,52394.01 54150,52400 ; S2.9@54199.64,52405.99 54150,52400 ; S2.9@54204.42,52404.06 54250,52350 ; S2.9@54212.52,52409.96 54250,52350 ; S2.9@54221.45,52414.69 54250,52350 ; S3.9@54585.31,52378.55 54650,52350 ; S3.9@54590.04,52387.48 54650,52350 ; S3.9@54593.24,52374.89 54550,52400 ; S3.9@54593.24,52425.11 54550,52400 ; S3.9@54595.94,52395.58 54650,52350 ; S3.9@54597.44,52384.21 54550,52400 ; S3.9@54597.44,52415.79 54550,52400 ; S3.9@54599.64,52394.01 54550,52400 ; S3.9@54599.64,52405.99 54550,52400 ; S3.9@54604.42,52404.06 54650,52350 ; S3.9@54612.52,52409.96 54650,52350 ; S3.9@54621.45,52414.69 54650,52350 ; S4.9@54993.24,52374.89 54950,52400 ; S4.9@54993.24,52425.11 54950,52400 ; S4.9@54997.44,52384.21 54950,52400 ; S4.9@54997.44,52415.79 54950,52400 ; S4.9@54999.64,52394.01 54950,52400 ; S4.9@54999.64,52405.99 54950,52400 ; S4.9@55000,52400 54950,52400 ; 53750,52400 S1.9@53800,52400 ; 53750,52400 S1.9@53800,52400 ; S1.9@53800,52400 53850,52350 ; 53850,52350 54100,52350 54150,52400 ; 54150,52400 S2.9@54200,52400 ; 54150,52400 S2.9@54200,52400 ; S2.9@54200,52400 54250,52350 ; 54250,52350 54500,52350 54550,52400 ; 54550,52400 S3.9@54600,52400 ; 54550,52400 S3.9@54600,52400 ; S3.9@54600,52400 54650,52350 ; 54650,52350 54900,52350 54950,52400
P25: J2.4 S1.2 S2.2 S3.2 S4.2 U1.37 | length 4201.2
  BottomLayer w10: U1.37@53100,52200 J2.4@53200,52200 53300,52200 53325,52225 53325,52375 53350,52400 S1.2@53500,52400 53700,52400 53750,52450 53825,52450 53875,52400 S2.2@53900,52400 54100,52400 54150,52450 54225,52450 54275,52400 S3.2@54300,52400 54500,52400 54550,52450 54625,52450 54675,52400 S4.2@54700,52400 ; U1.37@53100.3,52194.01 53161,52200 ; U1.37@53100.3,52205.99 53161,52200 ; U1.37@53102.1,52184.14 53161,52200 ; U1.37@53102.1,52215.86 53161,52200 ; U1.37@53105.54,52174.6 53161,52200 ; U1.37@53105.54,52225.4 53161,52200 ; J2.4@53194.95,52176 53140.47,52200 ; J2.4@53194.95,52224 53140.47,52200 ; J2.4@53198.23,52185.58 53140.47,52200 ; J2.4@53198.23,52214.42 53140.47,52200 ; J2.4@53201.77,52185.58 53259.53,52200 ; J2.4@53201.77,52214.42 53259.53,52200 ; J2.4@53205.05,52176 53259.53,52200 ; J2.4@53205.05,52224 53259.53,52200 ; S1.2@53494.46,52374.6 53439,52400 ; S1.2@53494.46,52425.4 53439,52400 ; S1.2@53497.9,52384.14 53439,52400 ; S1.2@53497.9,52415.86 53439,52400 ; S1.2@53499.7,52394.01 53439,52400 ; S1.2@53499.7,52405.99 53439,52400 ; S1.2@53500.3,52394.01 53561,52400 ; S1.2@53500.3,52405.99 53561,52400 ; S1.2@53502.1,52384.14 53561,52400 ; S1.2@53502.1,52415.86 53561,52400 ; S1.2@53505.54,52374.6 53561,52400 ; S1.2@53505.54,52425.4 53561,52400 ; S2.2@53900.3,52394.01 53961,52400 ; S2.2@53900.3,52405.99 53961,52400 ; S2.2@53902.1,52384.14 53961,52400 ; S2.2@53902.1,52415.86 53961,52400 ; S2.2@53905.54,52374.6 53961,52400 ; S2.2@53905.54,52425.4 53961,52400 ; S3.2@54300.3,52394.01 54361,52400 ; S3.2@54300.3,52405.99 54361,52400 ; S3.2@54302.1,52384.14 54361,52400 ; S3.2@54302.1,52415.86 54361,52400 ; S3.2@54305.54,52374.6 54361,52400 ; S3.2@54305.54,52425.4 54361,52400
P26: J2.3 S1.10 S2.10 S3.10 S4.10 U1.38 | length 4382.9
  BottomLayer w10: U1.38@53100,52300 J2.3@53200,52300 53275,52300 53300,52325 53300,52425 53325,52450 53700,52450 53750,52500 ; U1.38@53100.3,52294.01 53161,52300 ; U1.38@53100.3,52305.99 53161,52300 ; U1.38@53102.1,52284.14 53161,52300 ; U1.38@53102.1,52315.86 53161,52300 ; U1.38@53105.54,52274.6 53161,52300 ; U1.38@53105.54,52325.4 53161,52300 ; J2.3@53194.95,52276 53140.47,52300 ; J2.3@53194.95,52324 53140.47,52300 ; J2.3@53198.23,52285.58 53140.47,52300 ; J2.3@53198.23,52314.42 53140.47,52300 ; J2.3@53201.77,52285.58 53259.53,52300 ; J2.3@53201.77,52314.42 53259.53,52300 ; J2.3@53205.05,52276 53259.53,52300 ; J2.3@53205.05,52324 53259.53,52300 ; S1.10@53793.24,52474.89 53750,52500 ; S1.10@53793.24,52525.11 53750,52500 ; S1.10@53797.44,52484.21 53750,52500 ; S1.10@53797.44,52515.79 53750,52500 ; S1.10@53799.64,52494.01 53750,52500 ; S1.10@53799.64,52505.99 53750,52500 ; S2.10@54193.24,52474.89 54150,52500 ; S2.10@54193.24,52525.11 54150,52500 ; S2.10@54197.44,52484.21 54150,52500 ; S2.10@54197.44,52515.79 54150,52500 ; S2.10@54199.64,52494.01 54150,52500 ; S2.10@54199.64,52505.99 54150,52500 ; S3.10@54593.24,52474.89 54550,52500 ; S3.10@54593.24,52525.11 54550,52500 ; S3.10@54597.44,52484.21 54550,52500 ; S3.10@54597.44,52515.79 54550,52500 ; S3.10@54599.64,52494.01 54550,52500 ; S3.10@54599.64,52505.99 54550,52500 ; S4.10@54993.24,52474.89 54950,52500 ; S4.10@54993.24,52525.11 54950,52500 ; S4.10@54997.44,52484.21 54950,52500 ; S4.10@54997.44,52515.79 54950,52500 ; S4.10@54999.64,52494.01 54950,52500 ; S4.10@54999.64,52505.99 54950,52500 ; S4.10@55025,52500 S4.10@55000,52500 54950,52500 ; 53750,52500 S1.10@53800,52500 ; 53750,52500 S1.10@53800,52500 ; S1.10@53800,52500 53825,52500 53875,52450 54100,52450 54150,52500 ; 54150,52500 S2.10@54200,52500 ; 54150,52500 S2.10@54200,52500 ; S2.10@54200,52500 54225,52500 54275,52450 54500,52450 54550,52500 ; 54550,52500 S3.10@54600,52500 ; 54550,52500 S3.10@54600,52500 ; S3.10@54600,52500 54625,52500 54675,52450 54900,52450 54950,52500